# Altium PCB wes-iot.PcbDoc
Units mm, origin at the board's own origin, x right, y up, seen from the top; angles counter-clockwise.
Board outline 55 x 75 mm, 2 copper layers (Top Layer, Bottom Layer); 6 components, 9 nets, 39 pads, 0 vias.
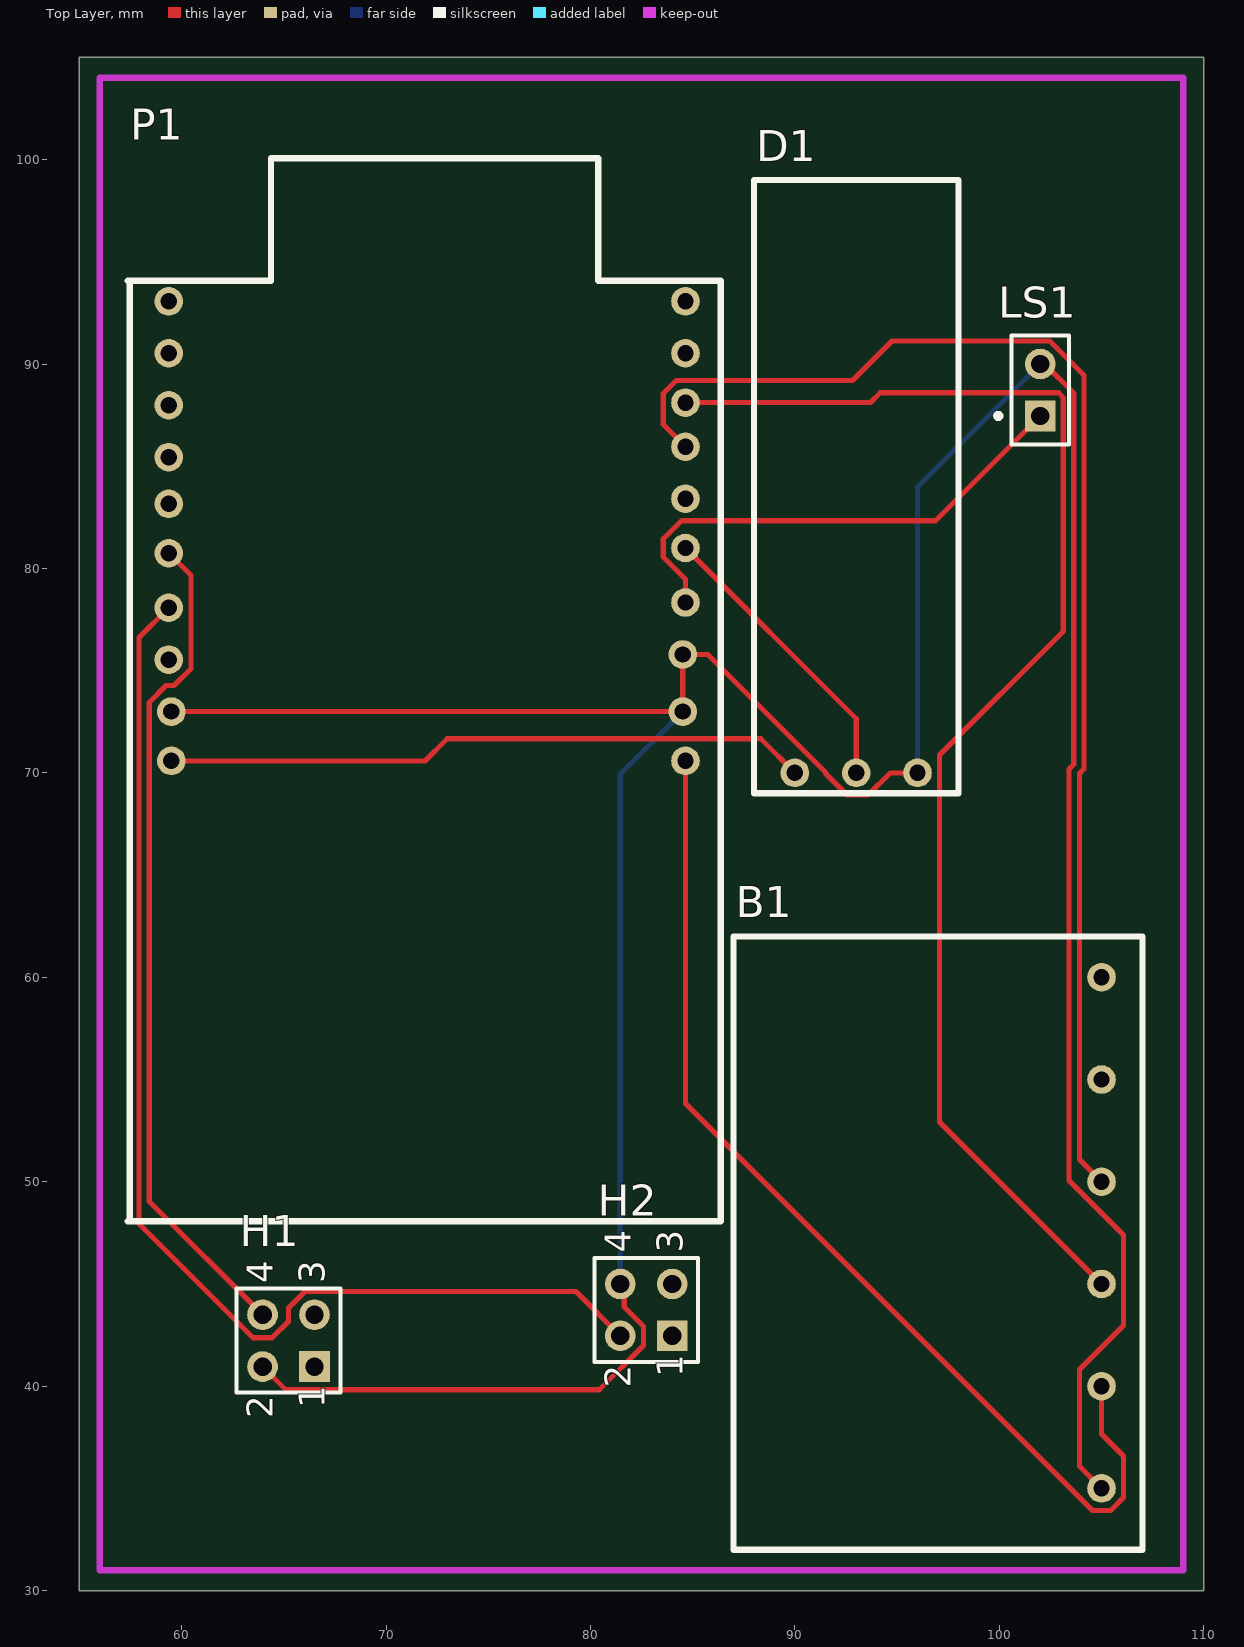
[diagram p0: Top Layer view]
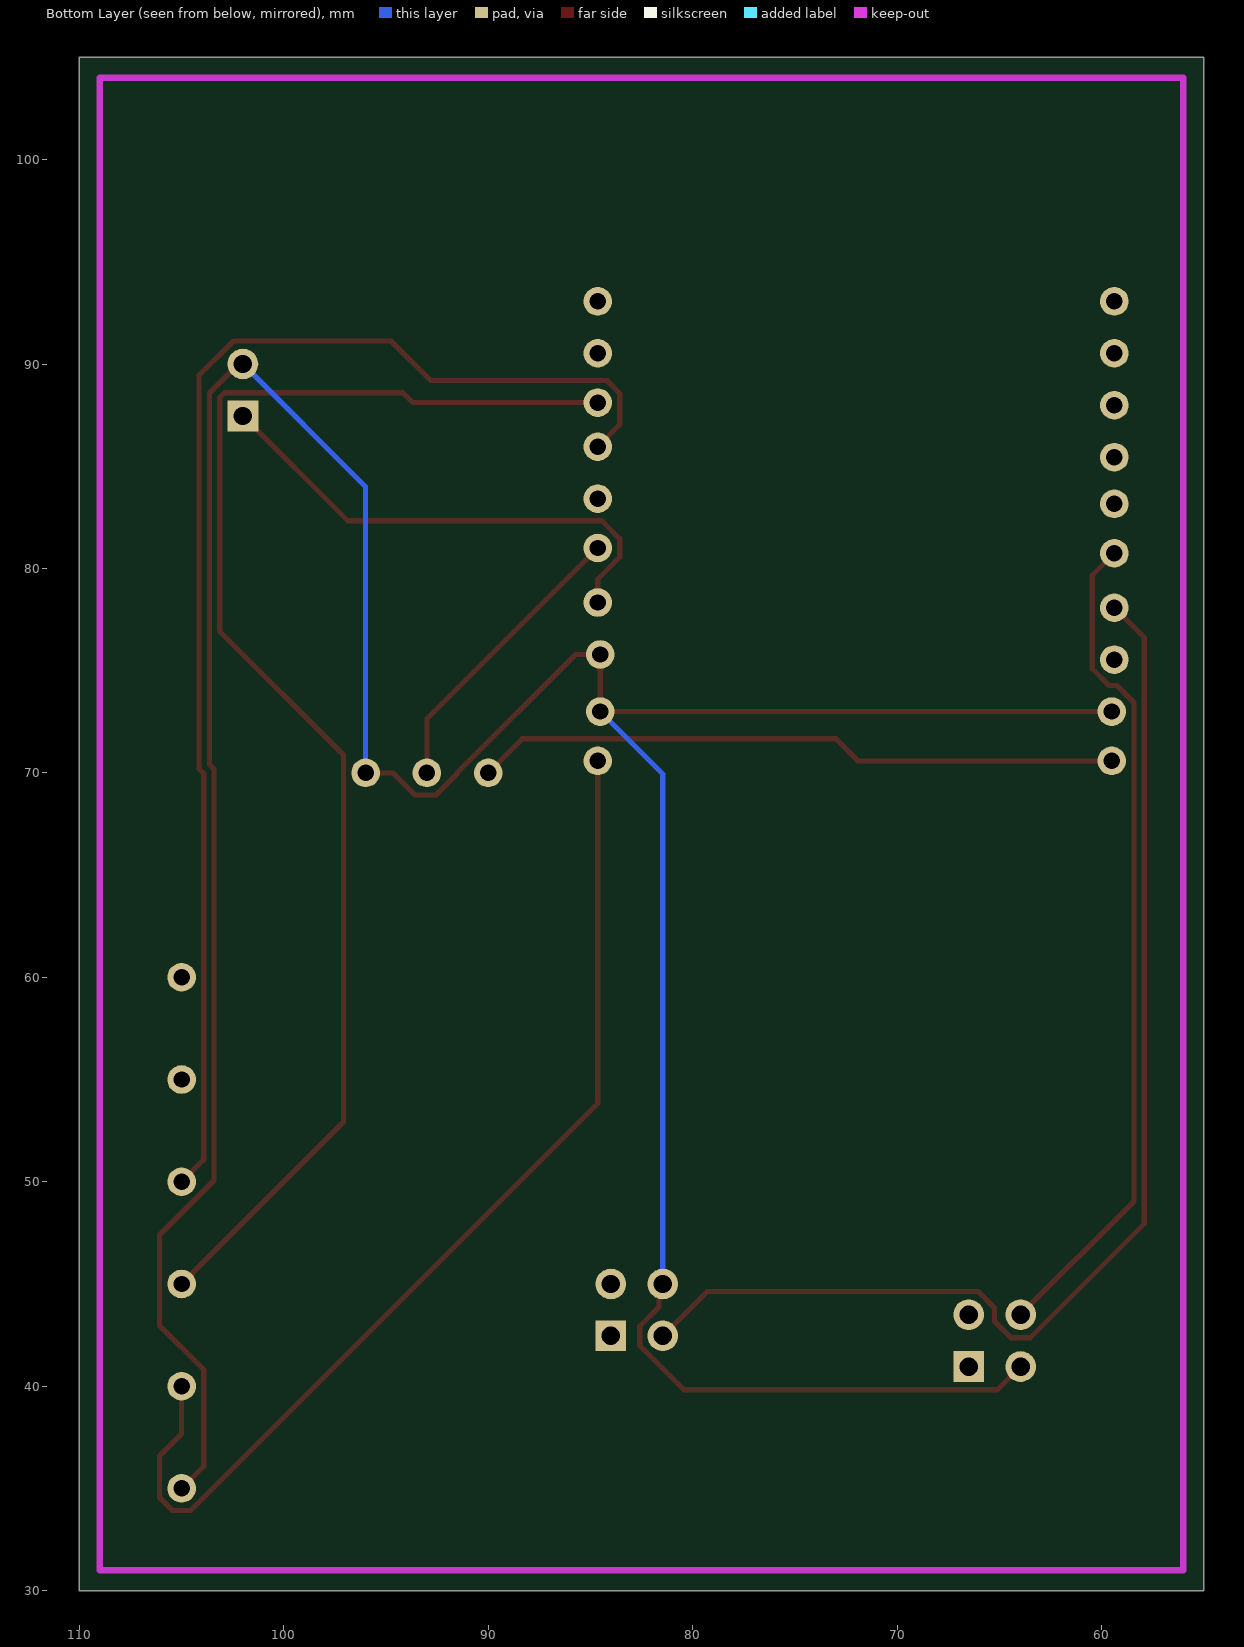
[diagram p1: Bottom Layer view, seen from below]

## Layer stack, top to bottom
Top Solder: solder mask 0.0102, Solder Resist, Dk 3.5
Top Layer: signal copper 0.0356
Dielectric 1: dielectric 0.32, FR-4, Dk 4.8
Bottom Layer: signal copper 0.0356
Bottom Solder: solder mask 0.0102, Solder Resist, Dk 3.5

## Board outline
55,30 55,105 110,105 110,30

## Design rules (kind name [scope] priority, off if disabled: settings)
Clearance [All] p1: gap=0.254 ignorepadtopadclearanceinfootprint=FALSE except(0: Arc-Hole Track-Hole SMDPad-Hole THPad-Hole Via-Hole Fill-Hole Poly-Hole Region-Hole Text-Hole)
PolygonConnect [All] p1: connectstyle=Relief reliefconductorwidth=0.254 reliefentries=4 polygonreliefangle="90 Angle" airgapwidth=0.254
RoutingVias [All] p1: holewidth=0.711 width=1.27 viastyle="Through Hole" minholewidth=0.711 minwidth=1.27 maxholewidth=0.711 maxwidth=1.27
SolderMaskExpansion [All] p1: expansion=0.102 istentingtop=FALSE
Width [All] p1: maxlimit=0.254 minlimit=0.254 preferedwidth=0.254
30 further rules are at their usual default settings.

## Components (designator, comment, footprint, x,y, rotation, side; value= is the part's Value field where it differs from the comment)
B1 "BMP280 Joy IT" "BMP280 Joy IT" 105,35 r90 top
D1 "DHT11" PCBComponent_1 90,70 r0 top
H1 "Heating System" HDR2X2 66.5,40.96 r90 top
H2 "Cooling System" HDR2X2 84,42.46 r90 top
LS1 "Piezo zvučnik" PIN2 102,87.46 r90 top
P1 "Croduino Nova 2" "Croduino Nova 2" 59.373,93.066 r0 top

## Footprints (in the part's own frame and the unit in brackets; to place one, negate y for a bottom-side part, rotate by r counter-clockwise, add the part's x,y. Pads: shape width x height; smd on the part's side, far side on the other; paste and mask are expansions set on the pad)
"BMP280 Joy IT" [mm]
  round 1.4 hole 0.8: 1(0,0) 2(5,0) 3(10,0) 4(15,0) 5(20,0) 6(25,0)
  silkscreen extent -3,-2 27,18
"Croduino Nova 2" [mm]
  round 1.4 hole 0.8: 1(0,0) 2(0,-2.54) 3(0,-5.08) 4(0,-7.62) 5(0,-9.906) 6(0,-12.319) 7(0,-14.986) 8(0,-17.526) 9(0.127,-20.066) 10(0.127,-22.479) 11(25.273,0) 12(25.273,-2.54) 13(25.273,-4.953) 14(25.273,-7.112) 15(25.273,-9.652) 16(25.273,-12.065) 17(25.273,-14.732) 18(25.146,-17.272) 19(25.146,-20.066) 20(25.273,-22.479)
  silkscreen extent -2,-45 27,7
HDR2X2 [mm] "Connector; Header; 2x2 Position"
  rect 1.5x1.5 hole 0.9: 1(0,0)
  round 1.5 hole 0.9: 2(0,2.54) 3(2.54,0) 4(2.54,2.54)
  silkscreen extent -1.27,-1.27 3.81,3.81
PCBComponent_1 [mm]
  round 1.4 hole 0.8: 1(0,0) 2(3,0) 3(6,0)
  silkscreen extent -2,-1 8,29
PIN2 [mm] "Photosensitive Diode; 2 Leads"
  rect 1.5x1.5 hole 0.9: 1(0,0)
  round 1.5 hole 0.9: 2(2.54,0)
  silkscreen extent -1.4,-1.4 3.94,2.17

## Part data
H1 H2: library part "Header 2X2", "Header, 2-Pin, Dual row", LatestRevisionDate=17-Jul-2002, LatestRevisionNote="Re-released for DXP Platform.", Publisher="Altium Limited"
LS1: library part Speaker, "Loudspeaker", LatestRevisionDate=17-Jul-2002, LatestRevisionNote="Re-released for DXP Platform.", PackageReference=PIN2, Published=24-Mar-1999, Publisher="Altium Limited"

## Nets (pads, with @x,y where several pads share a name; then routed paths per layer and width w, separated by ;. In a path a pad name is that pad's centre, name@x,y a point inside that pad or via, vN(x,y) a via of type N, cw(c..) or ccw(c..) an arc to the next point about the centre after c; other vN are vias at no path point)
3V3: B1.2 P1.20 | length 52.6
  Top Layer w0.254: P1.20 84.646,53.825 104.552,33.919 105.448,33.919 106.081,34.552 106.081,36.581 105,37.662 B1.2
+5V: D1.1 P1.10 | length 31.6
  Top Layer w0.254: P1.10 71.911,70.587 72.992,71.668 88.332,71.668 D1.1
GND: B1.1 D1.3 H1.2 H2.4 LS1.2 P1.9 P1.18 P1.19 | length 176.2
  Top Layer w0.254: P1.9 P1.19 P1.18 85.735,75.794 91.5,70.029 91.5,69.971 92.552,68.919 93.581,68.919 94.662,70 D1.3 ; H1.2 65.091,39.829 80.428,39.829 82.591,41.992 82.591,42.928 81.65,43.869 81.65,44.81 H2.4 ; LS1.2 102.217,90 103.639,88.578 103.639,70.414 103.411,70.186 103.411,50.06 106.081,47.39 106.081,42.972 103.919,40.81 103.919,36.081 B1.1
  Bottom Layer w0.254: H2.4 81.46,69.941 P1.19 ; D1.3 96,84 LS1.2
NetB1_3: B1.3 P1.13 | length 67.9
  Top Layer w0.254: P1.13 93.693,88.113 94.171,88.591 102.908,88.591 103.131,88.368 103.131,76.921 97.081,70.871 97.081,52.919 B1.3
NetB1_4: B1.4 P1.14 | length 65.4
  Top Layer w0.254: P1.14 83.565,87.035 83.565,88.561 84.198,89.194 92.813,89.194 94.75,91.131 102.468,91.131 104.147,89.452 104.147,70.204 103.919,69.976 103.919,51.081 B1.4
NetD1_2: D1.2 P1.16 | length 14.5
  Top Layer w0.254: P1.16 93,72.647 D1.2
NetH1_4: H1.4 P1.6 | length 41.1
  Top Layer w0.254: P1.6 60.454,79.666 60.454,75.092 59.632,74.27 59.241,74.27 58.419,73.448 58.419,49.041 H1.4
NetH2_2: H2.2 P1.7 | length 58.8
  Top Layer w0.254: P1.7 57.911,76.618 57.911,47.95 63.492,42.369 64.428,42.369 65.23,43.171 65.23,43.829 66.032,44.631 79.289,44.631 H2.2
NetLS1_1: LS1.1 P1.17 | length 24.5
  Top Layer w0.254: P1.17 84.646,79.472 83.565,80.553 83.565,81.449 84.449,82.333 96.873,82.333 LS1.1
pads on no net: B1.5 B1.6 H1.1 H1.3 H2.1 H2.3 P1.1 P1.2 P1.3 P1.4 P1.5 P1.8 P1.11 P1.12 P1.15

## Keep-outs
Keep-Out Layer:
  lines w0.31: 56,31 56,79 56,91 56,104 109,104 109,91 109,79 109,31 56,31

## Silkscreen, mask and mechanical layers (free items; w line width, h text height)
Mechanical 1:
  lines w0.31: 55,30 55,80 55,92 55,105 110,105 110,92 110,80 110,30 55,30

## Dimensions
55,30 to 110,30 on Mechanical 1

## Text inside footprints (layer, text, board x,y; h text height)
H1: Top Overlay "1" at 67.008,38.928 h1.27 r90; Top Overlay "2" at 64.468,38.42 h1.27 r90; Top Overlay "4" at 64.468,45.024 h1.27 r90; Top Overlay "3" at 67.008,45.024 h1.27 r90
H2: Top Overlay "1" at 84.508,40.428 h1.27 r90; Top Overlay "2" at 81.968,39.92 h1.27 r90; Top Overlay "4" at 81.968,46.524 h1.27 r90; Top Overlay "3" at 84.508,46.524 h1.27 r90